# Altium PCB PCB2.PcbDoc (part 3 of 3)
Units mil, origin at the board's own origin, x right, y up, seen from the top; angles counter-clockwise.
Board outline 7000 x 3315 mil, 4 copper layers (Top Signal, GND, PWR, Bottom Signal), stack 23.756 mil thick; 198 components, 124 nets, 690 pads, 273 vias.
Unrouted connection lines stored in the file: 2.
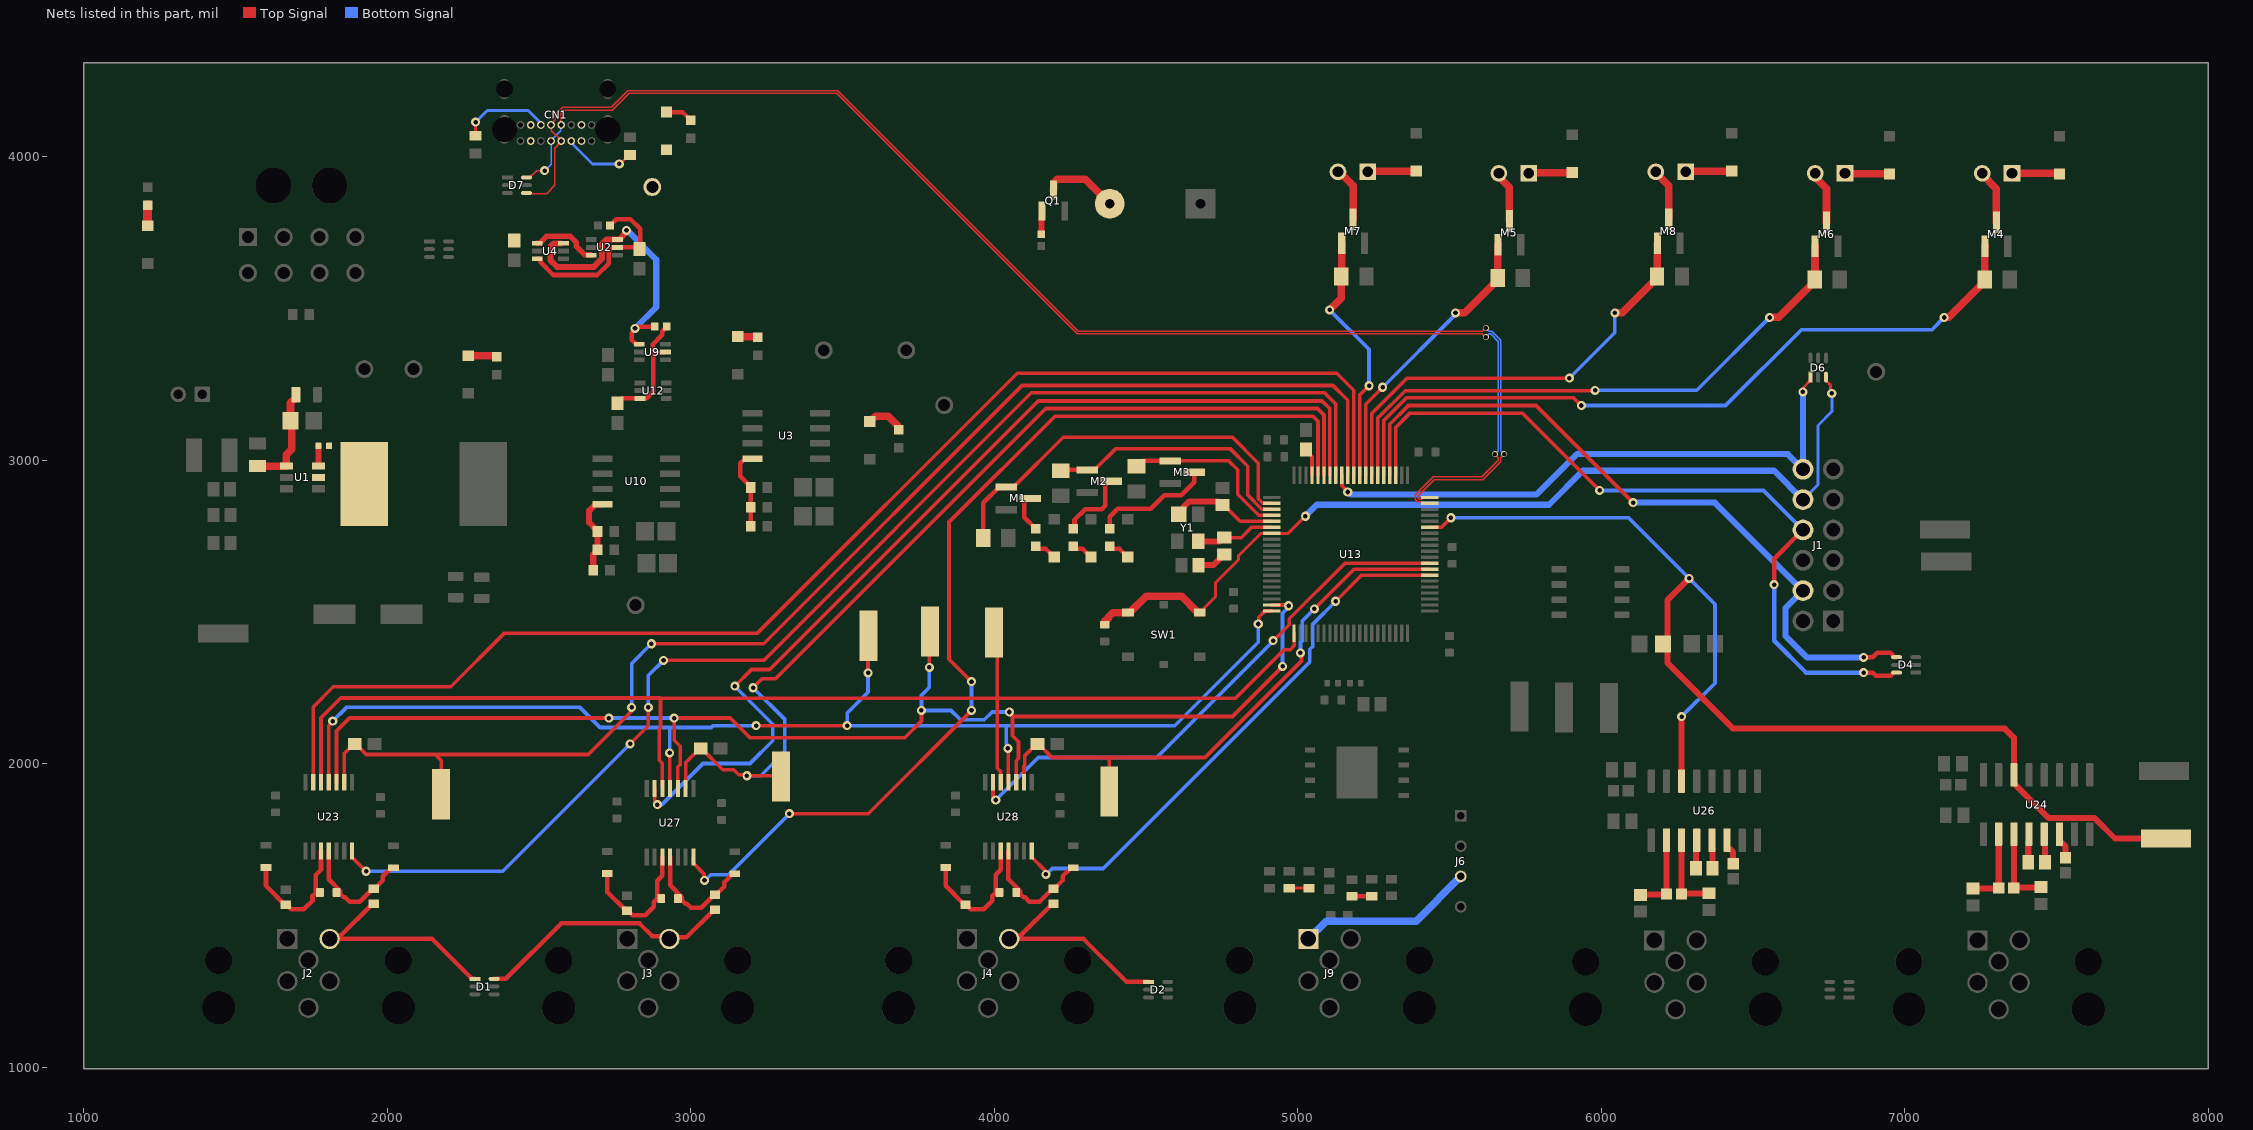
[diagram p5: the nets of this part, all layers, seen from the top]

## Via types
v1: diameter 30, hole 15, Top Signal to Bottom Signal, 174 vias
v2: diameter 50, hole 28, Top Signal to Bottom Signal, 63 vias
v3: diameter 40, hole 20, Top Signal to Bottom Signal, 22 vias
v4: diameter 20, hole 15, Top Signal to Bottom Signal, 5 vias
v5: diameter 50, hole 30, Top Signal to Bottom Signal, 4 vias
v6: diameter 200, hole 125, Top Signal to Bottom Signal, 4 vias
v7: diameter 50, hole 25, Top Signal to Bottom Signal, 1 vias

## Nets (pads, with @x,y where several pads share a name; then routed paths per layer and width w, separated by ;. In a path a pad name is that pad's centre, name@x,y a point inside that pad or via, vN(x,y) a via of type N, cw(c..) or ccw(c..) an arc to the next point about the centre after c; other vN are vias at no path point) (continued)
LC_I2C_SDA: R17.2 SDA.1 U13.55 U24.14 U26.14 | length 3989
  Top Signal w12: U13.55@5435.5,2778.58 5436,2779.08 5474.08,2779.08 v1(5505,2810)
  Top Signal w20: U26.14@6265,1942.44 v1(6265,2155) ; v1(6290,2610) 6218,2538 6218,2408.61 R17.2@6203.39,2394 6218,2379.39 6218,2332 6435,2115 7330,2115 7360,2085 U24.14@7360,1962.44 7360,1935.47 7475.13,1820.34 7625.88,1820.34 7693.22,1753 SDA.1@7861,1753
  Bottom Signal w12: v1(5505,2810) 6090,2810 v1(6290,2610) 6375,2525 6375,2265 v1(6265,2155)
MCU_Debug_LED1: M1.1 R14.1 U13.2 | length 1315.1
  Top Signal w12: M1.1@4039.63,2911.4 4063.25,2911.4 4226.85,3075 4785,3075 4870,2990 4870,2872.87 4885.04,2857.82 4914,2857.82 U13.2@4914.5,2857.32
  Top Signal w15: R14.1@3963.66,2743 3963.66,2859.06 4016.01,2911.4 M1.1@4039.63,2911.4
MCU_Debug_LED2: M2.1 R15.1 U13.3 | length 864.2
  Top Signal w12: M2.1@4307,2967.8 4330.62,2967.8 4400.82,3038 4777,3038 4835,2980 4835,2885 4881.86,2838.14 4914,2838.14 U13.3@4914.5,2837.64
  Top Signal w15: R15.1@4219,2965.34 4221.46,2967.8 M2.1@4307,2967.8
MCU_Debug_LED3: M3.1 R20.1 U13.4 | length 574.2
  Top Signal w12: M3.1@4580.63,2997.4 4772.6,2997.4 4802.08,2967.92 4802.08,2912.59 4802.08,2887.92 4871.55,2818.45 4914,2818.45 U13.4@4914.5,2817.95
  Top Signal w15: R20.1@4469,2979.34 4474.91,2979.34 4492.97,2997.4 M3.1@4580.63,2997.4
MCU_Ext_LED_Ind1: M4.1 R23.1 U13.65 | length 2487.9
  Top Signal w12: U13.65@5283.27,2950.5 5283.27,3130.9 5357.37,3205 5910,3205 v1(5935,3180)
  Top Signal w25: v1(7130,3470) 7130.96,3470.96 7145.72,3470.96 7263.86,3589.09 R23.1@7263.86,3595 7264.53,3595.67 7264.53,3704.33 M4.1@7265.2,3705
  Bottom Signal w12: v1(5935,3180) 6410,3180 6660,3430 7090,3430 v1(7130,3470)
MCU_Ext_LED_Ind2: M6.1 R25.1 U13.66 | length 1932.1
  Top Signal w12: U13.66@5263.58,2950.5 5263.58,3138.58 5354,3229 5979,3229 v1(5980,3230) ; v1(6555,3470) v1@6555,3470.39
  Top Signal w25: v1(6555,3470) 6555.96,3470.96 6585.72,3470.96 6703.86,3589.09 R25.1@6703.86,3595 ; R25.1@6703.64,3595.22 R25.1@6703.86,3595 ; M6.1@6705.2,3705 6704.53,3704.33 6704.53,3595.67 R25.1@6703.86,3595
  Bottom Signal w12: v1(5980,3230) 6315,3230 v1(6555,3470)
MCU_Ext_LED_Ind3: M8.1 R27.1 U13.67 | length 1482.3
  Top Signal w12: U13.67@5243.9,2950.5 5243.9,3153.9 5360,3270 v1(5895,3270)
  Top Signal w25: v1(6045,3485) 6069.76,3485 6183.86,3599.09 R27.1@6183.86,3605 6184.53,3605.67 6184.53,3714.33 M8.1@6185.2,3715
  Bottom Signal w12: v1(5895,3270) 6045,3420 v1(6045,3485)
MCU_Ext_LED_Ind4: M5.1 R24.1 U13.68 | length 957.8
  Top Signal w12: U13.68@5224.21,2950.5 5224.21,3184.21 v1(5280,3240)
  Top Signal w25: v1(5520,3485) 5520.96,3485.96 5550.72,3485.96 5658.86,3594.09 R24.1@5658.86,3600 ; R24.1@5658.64,3600.22 R24.1@5658.86,3600 ; M5.1@5660.2,3710 5659.53,3709.33 5659.53,3600.67 R24.1@5658.86,3600
  Bottom Signal w12: v1(5280,3240) 5518.47,3478.47 5518.47,3483.47 v1(5520,3485)
MCU_Ext_LED_Ind5: M7.1 R26.1 U13.69 | length 855.9
  Top Signal w12: v1@5103.47,3502.32 5103.47,3496.53 v1(5105,3495) ; U13.69@5204.53,2950.5 5204.53,3214.53 v1(5235,3245)
  Top Signal w25: v1(5105,3495) 5143.86,3533.86 R26.1@5143.86,3605 ; R26.1@5143.64,3605.22 R26.1@5143.86,3605 ; M7.1@5145.2,3715 5144.53,3714.33 5144.53,3605.67 R26.1@5143.86,3605
  Bottom Signal w12: v1(5105,3495) 5235,3365 v1(5235,3245)
NetC1_1: C1.1 L1.1 U1.5
NetC1_2: C1.2 U1.6 | length 67.2
  Top Signal w20: C1.2@1772.28,3047 cw(c1772.28,3045.98) 1773.3,3045.98 U1.6@1773.3,2980.4
NetC7_1: C7.1 R1.1 R3.1 U1.1 | length 348.4
  Top Signal w25: R3.1@1572,2980.6 1572,2980.4 U1.1@1667,2980.4 1667,3017.82 1685.5,3036.32 1685.5,3125.11 R1.1@1680.61,3130 1680.61,3188.26 1695.26,3202.91 1696.11,3202.91 1698.57,3205.37 C7.1@1698.57,3216
NetC13_2: C13.2 R5.1 R6.2 U3.4 | length 260.9
  Top Signal w15: C13.2@3197.44,2790 R6.2@3197.44,2845 R5.1@3197.44,2910 3197.44,2911.97 3163,2946.41 3163,2989.5 3175.5,3002 3200.75,3002 U3.4@3203.75,3005
NetC16_2: C16.2 R10.1 R11.2 U10.4 | length 266.3
  Top Signal w20: C16.2@2678.44,2637 2678.44,2689.03 2692.44,2703.03 R11.2@2692.44,2705 R10.1@2692.44,2765 2686.69,2770.75 2686.69,2772.72 2665,2794.41 2665,2833.5 2686,2854.5 2708.25,2854.5 U10.4@2708.75,2855
NetC27_2: C27.2 R22.1 | length 105.9
  Top Signal w20: C27.2@4671.28,2652.72 C27.2@4672.56,2654 4722.24,2654 4744.38,2676.13 4744.38,2679.76 4754.06,2689.44 R22.1@4758,2689.44 R22.1@4756.72,2688.16
NetC32_2: C32.2 C33.2 R33.1 U23.3 | length 429.6
  Top Signal w15: C32.2@1600,1657.48 1600,1596.81 1662.05,1534.76 R33.1@1665,1534.76 ; R33.1@1667.95,1534.76 1682.72,1520 1725,1520 1753.32,1548.32 1753.32,1563.68 1764.65,1575 1764.65,1633.54 1781.18,1650.07 U23.3@1781.18,1711.81
NetC33_1: C33.1 C34.2 R34.1 U23.4 | length 396.8
  Top Signal w15: U23.4@1806.77,1711.81 1806.77,1618.5 1845.35,1579.92 1845.35,1575 1845.35,1570.08 1856.68,1558.76 1861.6,1558.76 1875.35,1545 1909.25,1545 1952.05,1587.8 R34.1@1955,1587.8 1957.95,1587.8 1985,1614.84 1985,1628.19 2013.5,1656.69 C34.2@2020,1656.69
NetC38_2: C38.2 U24.6 | length 90
  Top Signal w20: U24.6@7510,1767.56 7510,1740.59 7511.81,1738.78 7518.28,1738.78 7530,1727.06 C38.2@7530,1689.61
NetC39_1: C39.1 R36.2 U24.2 | length 264.1
  Top Signal w20: R36.2@7225,1587.56 7226.22,1588.78 7309.17,1588.78 C39.1@7310.39,1590 7310.2,1590.2 7310.2,1767.36 U24.2@7310,1767.56
NetC39_2: C39.2 R35.2 U24.3 | length 269.2
  Top Signal w20: U24.3@7360,1767.56 7359.8,1767.36 7359.8,1590.2 C39.2@7359.61,1590 7360.89,1591.28 7448.72,1591.28 R35.2@7450,1592.56
NetC40_1: C40.1 U24.4 | length 93.6
  Top Signal w20: C40.1@7407.44,1675 7407.44,1738.03 7410,1740.59 U24.4@7410,1767.56
NetC40_2: C40.2 U24.5 | length 93.6
  Top Signal w20: U24.5@7460,1767.56 7460,1740.59 7462.56,1738.03 C40.2@7462.56,1675
NetC44_2: C44.2 U26.6 | length 90
  Top Signal w20: U26.6@6415,1747.56 6415,1720.59 6416.81,1718.78 6423.28,1718.78 6435,1707.06 C44.2@6435,1669.61
NetC45_1: C45.1 R44.2 U26.2 | length 264.1
  Top Signal w20: R44.2@6130,1567.56 6131.22,1568.78 6214.17,1568.78 C45.1@6215.39,1570 6215.2,1570.2 6215.2,1747.36 U26.2@6215,1747.56
NetC45_2: C45.2 R43.2 U26.3 | length 269.2
  Top Signal w20: U26.3@6265,1747.56 6264.8,1747.36 6264.8,1570.2 C45.2@6264.61,1570 6265.89,1571.28 6353.72,1571.28 R43.2@6355,1572.56
NetC46_1: C46.1 U26.4 | length 93.6
  Top Signal w20: C46.1@6312.44,1655 6312.44,1718.03 6315,1720.59 U26.4@6315,1747.56
NetC46_2: C46.2 U26.5 | length 93.6
  Top Signal w20: U26.5@6365,1747.56 6365,1720.59 6367.56,1718.03 C46.2@6367.56,1655
NetC49_2: C49.2 C50.2 R45.1 U27.3 | length 429.6
  Top Signal w15: C49.2@2725,1637.48 2725,1576.81 2787.05,1514.76 R45.1@2790,1514.76 ; R45.1@2792.95,1514.76 2807.72,1500 2850,1500 2878.32,1528.32 2878.32,1543.68 2889.65,1555 2889.65,1613.54 2906.18,1630.07 U27.3@2906.18,1691.81
NetC50_1: C50.1 C51.2 R46.1 U27.4 | length 396.8
  Top Signal w15: U27.4@2931.77,1691.81 2931.77,1598.5 2970.35,1559.92 2970.35,1555 2970.35,1550.08 2981.68,1538.76 2986.6,1538.76 3000.35,1525 3034.25,1525 3077.05,1567.8 R46.1@3080,1567.8 3082.95,1567.8 3110,1594.84 3110,1608.19 3138.5,1636.69 C51.2@3145,1636.69
NetC54_2: C54.2 C55.2 R47.1 U28.3 | length 429.6
  Top Signal w15: C54.2@3840,1657.48 3840,1596.81 3902.05,1534.76 R47.1@3905,1534.76 ; R47.1@3907.95,1534.76 3922.72,1520 3965,1520 3993.32,1548.32 3993.32,1563.68 4004.65,1575 4004.65,1633.54 4021.18,1650.07 U28.3@4021.18,1711.81
NetC55_1: C55.1 C56.2 R48.1 U28.4 | length 396.8
  Top Signal w15: U28.4@4046.77,1711.81 4046.77,1618.5 4085.35,1579.92 4085.35,1575 4085.35,1570.08 4096.68,1558.76 4101.6,1558.76 4115.35,1545 4149.25,1545 4192.05,1587.8 R48.1@4195,1587.8 4197.95,1587.8 4225,1614.84 4225,1628.19 4253.5,1656.69 C56.2@4260,1656.69
NetCN1_A5: CN1.A5 R28.2 | length 240.7
  Top Signal w10: v1(2764,3976) 2766.59,3976 2796.06,4005.47 R28.2@2800,4005.47
  Bottom Signal w10: CN1.A5@2606.2,4051.54 2606.2,4047.32 2611.87,4041.65 2611.87,4040.02 2675.89,3976 v1(2764,3976)
NetCN1_B5: CN1.B5 R29.1 | length 298.8
  Top Signal w10: R29.1@2290,4069.53 2291,4070.53 v1(2291,4114)
  Bottom Signal w10: v1(2291,4114) 2329.36,4152.36 2463.97,4152.36 2500.13,4116.2 2500.13,4114.57 2505.8,4108.9 CN1.B5@2505.8,4104.69
NetDS1_1: DS1.1 U5.2 | length 68.5
  Top Signal w30: U5.2@1210,3772.01 DS1.1@1210,3840.47
NetDS2_1: DS2.1 U6.2 | length 91.4
  Top Signal w15: U6.2@2920,4147.01 2972.52,4147.01 DS2.1@3000,4119.53
NetDS3_1: DS3.1 U7.2 | length 97.8
  Top Signal w25: U7.2@2267.26,3345.26 U7.2@2266,3344 2356.53,3344 cw(c2356.53,3340.53) DS3.1@2360,3340.53
NetDS4_1: DS4.1 U8.2 | length 127.4
  Top Signal w25: U8.2@3590,3127.01 3595.22,3132.22 3596.2,3132.22 3608.98,3145 3650,3145 3681.75,3113.25 3681.75,3102.78 DS4.1@3685,3099.53
NetDS5_1: DS5.1 U11.2 | length 66.4
  Top Signal w25: U11.2@3155,3407.01 3217.52,3407.01 cw(c3217.52,3404.53) DS5.1@3220,3404.53
NetDS6_1: DS6.1 U14.2 | length 75.7
  Top Signal w15: DS6.1@4136,2715.47 4144.25,2707.22 4170.27,2707.22 4196.46,2681.03 U14.2@4197.45,2681.03
NetDS6_2: DS6.2 M1.3 | length 131.6
  Top Signal w15: M1.3@4118.37,2874 4103.31,2874 4099,2869.69 4099,2811.53 DS6.2@4136,2774.53
NetDS7_1: DS7.1 U15.2 | length 73
  Top Signal w15: DS7.1@4260,2715.47 4268.25,2707.22 4291.54,2707.22 4317.74,2681.03 U15.2@4318.72,2681.03
NetDS7_2: DS7.2 M2.3 | length 249.2
  Top Signal w15: DS7.2@4260,2774.53 4264.42,2778.95 4264.42,2803.42 4299.62,2838.62 4353.62,2838.62 4365,2850 4365,2926.09 4369.31,2930.4 M2.3@4385.74,2930.4
NetDS8_1: DS8.1 U16.2 | length 74.3
  Top Signal w15: DS8.1@4380,2715.48 4388.24,2707.23 4412.82,2707.23 4439.02,2681.03 U16.2@4440,2681.03
NetDS8_2: DS8.2 M3.3 | length 397.8
  Top Signal w15: DS8.2@4380,2774.53 4380,2813 4407,2840 4516,2840 4560,2884 4616,2884 4659.37,2927.37 M3.3@4659.37,2960
NetJ6_03: J6.03 J9.1 | length 586.9
  Bottom Signal w25: J9.1@5035.4,1422.08 5094.32,1481 5390,1481 J6.03@5537,1628
NetLS1_N: LS1.N Q1.3 | length 246.1
  Top Signal w25: Q1.3@4195,3890 4196,3891 4196,3913.28 4207.72,3925 4300.39,3925 LS1.N@4380.39,3845
NetM4_3: M4.3 P1.2 | length 180.6
  Top Signal w25: P1.2@7255.79,3945 7255.79,3941.42 7302.6,3894.61 M4.3@7302.6,3783.74
NetM5_3: M5.3 P2.2 | length 180.6
  Top Signal w25: P2.2@5650.79,3950 5650.79,3946.42 5697.6,3899.61 M5.3@5697.6,3788.74
NetM6_3: M6.3 P3.2 | length 180.6
  Top Signal w25: P3.2@6695.79,3945 6695.79,3941.42 6742.6,3894.61 M6.3@6742.6,3783.74
NetM7_3: M7.3 P4.2 | length 180.6
  Top Signal w25: P4.2@5135.79,3955 5135.79,3951.42 5182.6,3904.61 M7.3@5182.6,3793.74
NetM8_3: M8.3 P5.2 | length 180.6
  Top Signal w25: P5.2@6175.79,3955 6175.79,3951.42 6222.6,3904.61 M8.3@6222.6,3793.74
NetP1_1: P1.1 U17.2 | length 157.1
  Top Signal w25: P1.1@7354.21,3945 7508.19,3945 cw(c7508.19,3942.99) U17.2@7510.2,3942.99
NetP2_1: P2.1 U18.2 | length 144.9
  Top Signal w25: P2.1@5761.52,3945 5763.01,3946.5 5903.7,3946.5 U18.2@5905.2,3947.99
NetP3_1: P3.1 U19.2 | length 147.2
  Top Signal w25: P3.1@6803.82,3945 6804.82,3944 6949.19,3944 U19.2@6950.2,3942.99
NetP4_1: P4.1 U20.2 | length 160.3
  Top Signal w25: P4.1@5231.12,3950 5232.62,3951.5 5388.7,3951.5 U20.2@5390.2,3952.99
NetP5_1: P5.1 U21.2 | length 153
  Top Signal w25: P5.1@6278.43,3950 6279.92,3951.5 6428.7,3951.5 U21.2@6430.2,3952.99
NetQ1_1: Q1.1 R13.2 | length 77.2
  Top Signal w20: R13.2@4155,3744.69 4155,3798.25 4157.25,3800.5 Q1.1@4157.25,3821
NetR2_1: R2.1 R7.1 U2.5 U4.3 | length 617.1
  Top Signal w15: U4.3@2494.07,3663.04 2503.91,3663.04 2503.91,3653.19 2547.1,3610 2692,3610 2729.09,3647.09 2729.09,3688.05 2741.67,3700.63 2757.93,3700.63 U2.5@2758.31,3701 2825.56,3701 R7.1@2831,3695.56 2833,3697.56 2833,3701 2833,3762 2801,3794 2754.68,3794 R2.1@2733.68,3773
NetR8_1: R8.1 R12.1 U9.5 U12.3 | length 409
  Top Signal w15: R12.1@2759,3187.56 2759,3190.43 2771.98,3203.41 U12.3@2832.69,3203.41 2833.07,3203.78 2854.78,3203.78 2876,3225 2876,3346.99 2885.01,3356 U9.5@2916.31,3356 ; 2887,3356 2883,3360 2882.86,3360 2874.08,3368.79 2874.08,3381.21 2905.61,3412.75 2905.61,3424.93 R8.1@2920.68,3440
NetR37_1: R37.1 R38.2 | length 65.2
  Top Signal w15: R37.1@5179.1,1562.58 5179.51,1563 5243.49,1563 R38.2@5243.9,1563.42
NetR40_1: R40.1 R41.2 | length 65.3
  Top Signal w10: R41.2@4971.9,1589.42 4971.99,1589.5 5037.01,1589.5 R40.1@5037.1,1589.58
NetR49_1: R49.1 U13.77 | length 87.2
  Top Signal w12: R49.1@5032,3031.44 5032,3026.57 5047.05,3011.52 U13.77@5047.05,2950.5
NRST: C26.2 D6.3 J1.10 SW1.1 SW1.2 U13.7 | length 3081.8
  Top Signal w10: SW1.1@4436.72,2502 SW1.1@4440.89,2497.83 ; SW1.2@4677.11,2497.83 4683.02,2497.83 4691.8,2506.61 4691.8,2512.52 4729.28,2550 4729.28,2596.28 4805,2672 4805,2685 4878.4,2758.4 4914,2758.4 U13.7@4914.5,2758.9 4968.54,2758.9 5024.64,2815 v1(5025,2815) ; D6.3@6740.59,3273.47 6740.59,3262.09 6756.17,3246.5 6756.17,3223.83 v1(6760,3220)
  Top Signal w25: C26.2@4364,2470.35 4368.92,2470.35 4375.24,2476.68 4375.24,2481.6 4390.2,2496.55 4439.61,2496.55 SW1.1@4440.89,2497.83 ; SW1.1@4446.8,2497.83 4500.7,2551.74 4617.3,2551.74 4671.2,2497.83 SW1.2@4677.11,2497.83
  Bottom Signal w10: J1.10@6665,2870 6714.25,2919.25 6714.25,3114.25 6760,3160 v1(6760,3220)
  Bottom Signal w20: v1(5025,2815) 5063,2853 5828,2853 5940,2965 6570,2965 J1.10@6665,2870
PH0_OSC_IN: C25.2 U13.5 Y1.1 | length 355.5
  Top Signal w12: C25.2@4752,2852.44 4755.94,2852.44 4810.11,2798.27 U13.5@4914.5,2798.27
  Top Signal w20: Y1.1@4607.5,2822 4623,2837.5 4623,2844.19 4642.81,2864 4736.5,2864 4748.06,2852.44 C25.2@4752,2852.44
PH0_OSC_OUT: R22.2 U13.6 Y1.3 | length 266.2
  Top Signal w12: R22.2@4754.06,2744.56 R22.2@4761.94,2744.56 ; R22.2@4758,2744.56 4813.56,2744.56 4847.58,2778.58 U13.6@4914.5,2778.58
  Top Signal w20: Y1.3@4671.5,2732 4741.5,2732 R22.2@4754.06,2744.56
PrgmVsUSB: R8.2 U2.6 U4.6 U9.1 | length 959.3
  Top Signal w15: U9.1@2829.69,3381.59 2819.85,3381.59 2806,3395.44 2806,3419.94 2816,3429.94 v1(2816,3434) 2820.06,3434 2826.06,3440 R8.2@2881.31,3440
  Top Signal w20: U4.6@2572.59,3714.22 2548.72,3714.22 2537,3702.5 2537,3659 2559,3637 2680,3637 2707,3664 2707,3712 2721.59,3726.59 U2.6@2758.31,3726.59 2763.9,3726.59 2786.09,3748.78 2786.09,3755.09 v1(2788,3757)
  Bottom Signal w20: v1(2788,3757) 2790,3757 2886,3661 2886,3504 v1(2816,3434)
Prog_SWCLK: D4.4 J1.4 U13.64 | length 2390.3
  Top Signal w12: U13.64@5302.95,2950.5 5302.95,3117.95 5365,3180 5785,3180 v1(6105,2860)
  Top Signal w15: v1(6865,2350) 6895,2350 6910,2365 6953.3,2365 6963.05,2355.25 6963.05,2351.55 6964.01,2350.59 D4.4@6973.47,2350.59
  Bottom Signal w20: v1(6105,2860) 6375,2860 J1.4@6665,2570 6608,2513 6608,2420 6678,2350 v1(6865,2350)
Prog_SWDIO: D4.6 J1.8 U13.63 | length 2527.1
  Top Signal w12: U13.63@5322.64,2950.5 5322.64,3107.64 5370,3155 5740,3155 v1(5995,2900)
  Top Signal w15: v1(6570,2590) 6570,2675 J1.8@6665,2770 ; v1(6865,2300) 6865.3,2299.7 6895.3,2299.7 6905,2290 6954.6,2290 D4.6@6963.05,2298.45
  Bottom Signal w12: v1(5995,2900) 6535,2900 J1.8@6665,2770
  Bottom Signal w15: v1(6570,2590) 6570,2405 6675,2300 v1(6865,2300)
Prog_SWO: D6.1 J1.12 U13.72 | length 1956.3
  Top Signal w10: v1(6665,3225) 6666.91,3226.91 6666.91,3239.59 6689.41,3262.09 D6.1@6689.41,3273.47
  Top Signal w12: U13.72@5145.47,2950.5 5145.97,2950 5145.97,2915.57 5165,2896.54 v1(5165,2895)
  Bottom Signal w20: v1(5165,2895) 5167.71,2895 5175.71,2887 5787,2887 5920,3020 6615,3020 J1.12@6665,2970 v1(6665,3225)
TC1_Con_AN+: D1.1 J2.2 R34.2 | length 727
  Top Signal w15: R34.2@1955,1538.58 1952.05,1538.58 1845.48,1432.01 1819.53,1432.01 J2.2@1809.6,1422.08 2147.52,1422.08 2279.01,1290.59 D1.1@2288.47,1290.59
TC1_nDRDY: U13.73 U23.7 | length 4281.3
  Top Signal w12: U23.7@1883.54,1711.81 1883.54,1691.14 1929.69,1645 v1(1930,1645) ; v1(2800,2065) 2860,2125 v1(2860,2185) ; v1(2910,2340) 3240,2340 4122,3222 5088,3222 5125.79,3184.21 U13.73@5125.79,2950.5
  Bottom Signal w12: v1(1930,1645) 2380,1645 v1(2800,2065) ; v1(2860,2185) 2860,2290 v1(2910,2340)
TC1_nFault: U13.70 U23.13 | length 4436
  Top Signal w12: U23.13@1755.59,1938.19 1755.59,2186.59 1822,2253 2209,2253 2386,2430 3220,2430 4076,3286 5129,3286 5185,3230 5185,2950.66 U13.70@5184.84,2950.5
TC1_SPI_CS: CS1.1 R21.1 U13.71 U23.9 | length 4431.1
  Top Signal w12: U23.9@1857.95,1938.19 1857.95,2033.39 1889.57,2065 1895.32,2065 1930.32,2030 2158,2030 ; CS1.1@2177,1899 2177,2011 2158,2030 ; v1(2805,2185) 2803.47,2183.47 2803.47,2171.7 2661.77,2030 2158,2030 ; v1(2870,2395) 3240,2395 4091,3246 5116,3246 5165.16,3196.84 U13.71@5165.16,2950.5
  Bottom Signal w12: v1(2805,2185) 2805,2330 v1(2870,2395)
TC2_Con_AN+: D1.6 J3.2 R46.2 | length 865.1
  Top Signal w15: D1.6@2351.53,1290.59 2390.59,1290.59 2573.04,1473.04 2830.98,1473.04 2873.5,1430.52 2921.01,1430.52 J3.2@2929.46,1422.08 2934.34,1426.96 2985.43,1426.96 3077.05,1518.58 R46.2@3080,1518.58
TC2_nDRDY: U13.76 U27.7 | length 3400.5
  Top Signal w12: U27.7@3008.54,1691.81 3008.54,1671.14 3043.47,1636.22 3043.47,1616.53 v1(3045,1615) ; v1(3325,1835) 3585,1835 v1(3925,2175) ; v1(3925,2270) 3851,2344 3851,2796 4200,3145 5050,3145 5066.73,3128.27 U13.76@5066.73,2950.5
  Bottom Signal w12: v1(3045,1615) 3046.6,1615 3065.6,1634 3124,1634 v1(3325,1835) ; v1(3925,2175) v1(3925,2270)
TC2_nFault: U13.74 U27.13 | length 3335.5
  Top Signal w12: U27.13@2880.59,1918.19 2881.48,1917.3 2881.48,1875.68 2890,1867.16 v1(2890,1865) ; v1(3145,2255) 3200,2310 3260,2310 4145,3195 5080,3195 5106.1,3168.9 U13.74@5106.1,2950.5
  Bottom Signal w12: v1(2890,1865) 2890.3,1865.3 2905.3,1865.3 3040,2000 3195,2000 3270,2075 3270,2130 v1(3145,2255)
TC2_SPI_CS: CS2.1 R18.1 U13.75 U27.9 | length 3338.2
  Top Signal w12: U27.9@2982.95,1918.19 2982.95,2003.39 3029.57,2050 3035.32,2050 3105.32,1980 3141,1980 3157.56,1963.44 3181.56,1963.44 v1(3185,1960) 3294,1960 CS2.1@3297,1957 ; v1(3205,2250) 3235,2280 3280,2280 4170,3170 5065,3170 5086.42,3148.58 U13.75@5086.42,2950.5
  Bottom Signal w12: v1(3185,1960) 3230,1960 3310,2040 3310,2145 v1(3205,2250)
TC3_Con_AN+: D2.1 J4.2 R48.2 | length 711.7
  Top Signal w15: R48.2@4195,1538.58 4192.05,1538.58 4085.48,1432.01 4059.26,1432.01 J4.2@4049.32,1422.08 4294.18,1422.08 4435.67,1280.59 D2.1@4508.47,1280.59
TC3_nDRDY: U13.47 U28.7 | length 1837.4
  Top Signal w12: U28.7@4123.54,1711.81 4123.54,1691.14 4168.47,1646.22 4168.47,1636.53 v1(4170,1635) ; v1(5125,2535) 5211.1,2621.1 U13.47@5435.5,2621.1
  Bottom Signal w12: v1(4170,1635) 4171.6,1635 4190.6,1654 4359,1654 5040,2335 5040,2376.77 5050,2386.77 5050,2460 v1(5125,2535)
TC3_nFault: U13.49 U28.13 | length 1828.2
  Top Signal w12: U28.13@3995.59,1938.19 3995.59,1891.57 4005,1882.16 v1(4005,1880) ; v1(4919,2405) 4920,2405 4972.49,2457.49 4972.49,2477.49 5155.47,2660.47 U13.49@5435.5,2660.47
  Bottom Signal w12: v1(4005,1880) 4145,2020 4535,2020 4919,2404 v1(4919,2405)
TC3_SPI_CS: CS3.1 R16.1 U13.48 U28.9 | length 1907
  Top Signal w12: U28.9@4097.95,1938.19 4097.95,1991.57 4101,1994.61 4101,2026.43 4139.57,2065 R16.1@4142.44,2065 4145.32,2065 4190.32,2020 4380,2020 ; CS3.1@4379,1908 4379,2019 4380,2020 ; v1(5009,2365) 5012.44,2361.56 5012.44,2337.67 4694.77,2020 4380,2020 ; v1(5055,2510) 5185.79,2640.79 U13.48@5435.5,2640.79
  Bottom Signal w12: v1(5009,2365) 5009,2398 5015,2404 5015,2470 v1(5055,2510)
TC_SPI_MISO: MISO.1 U13.20 U23.11 U27.11 U28.11 | length 4270.8
  Top Signal w12: U23.11@1806.77,1938.19 1806.77,2124.61 1820,2137.84 v1(1820,2140) ; v1(2930,2035) 2930.89,2034.11 2930.89,1919.07 U27.11@2931.77,1918.19 ; v1(3215,2125) v1(3515,2125) ; v1(3584,2299) 3584,2419 MISO.1@3586,2421 ; v1(4045,2050) 4045.89,2049.11 4045.89,1939.07 U28.11@4046.77,1938.19 ; v1(4870,2460) 4871.53,2461.53 4871.53,2482.52 4892,2502.99 U13.20@4914.5,2502.99
  Bottom Signal w12: v1(1820,2140) 1865,2185 2635,2185 2701,2119 2930,2119 ; v1(2930,2035) 2930,2119 ; v1(3215,2125) 3073.06,2125 3067.06,2119 2930,2119 ; v1(3584,2299) 3584,2235 3515,2166 v1(3515,2125) 4040,2125 ; v1(4045,2050) 4041.56,2053.44 4041.56,2064.47 4040,2066.03 4040,2125 ; v1(4870,2460) 4870,2400 4595,2125 4040,2125
TC_SPI_MOSI: MOSI.1 U13.21 U23.12 U27.12 U28.12 | length 4384.5
  Top Signal w12: U23.12@1781.18,1938.19 1781.18,2151.18 1846,2216 2899,2216 2900,2215 ; U27.12@2906.18,1918.19 2906.18,2001.34 2895.36,2012.16 2895.36,2111.26 2900,2115.9 2900,2215 ; MOSI.1@3999,2450 4010,2439 4010,2215 ; U28.12@4021.18,1938.19 4020.84,1938.53 4020.84,1973.75 4010,1984.6 4010,2215 ; U13.21@4987.99,2429.5 4987.99,2387.83 4975.16,2375 4955,2375 4795,2215 4010,2215 ; 2900,2215 4010,2215
TC_SPI_SCK: SCK.1 U13.19 U23.10 U27.10 U28.10 | length 4498.3
  Top Signal w12: U23.10@1832.36,1938.19 1832.36,2107.36 1875,2150 v1(2730,2150) ; U27.10@2957.36,1918.19 2957.36,1989.48 2965,1997.11 2965,2057.12 2945,2077.12 v1(2945,2150) 3130,2150 3195,2085 3705,2085 3760,2140 v1(3760,2175) ; v1(3786,2317) 3786,2433 SCK.1@3788,2435 ; v1(4050,2170) 4050,2165.13 4060,2155.13 4060,2155 ; U28.10@4072.36,1938.19 4072.36,2009.48 4080,2017.11 4080,2072.06 4060,2092.06 4060,2155 ; U13.19@4914.5,2522.68 4965.16,2522.68 4967.84,2520 v1(4970,2520) ; v1(4950,2320) 4785,2155 4060,2155
  Bottom Signal w12: v1(2730,2150) v1(2945,2150) ; v1(3786,2317) 3786,2251 3760,2225 v1(3760,2175) 3857.48,2175 3888.48,2144 3967.27,2144 3993.27,2170 v1(4050,2170) ; v1(4950,2320) 4950,2495.13 4970,2515.13 v1(4970,2520)
USB_D_N: CN1.A7 CN1.B7 D7.6 U13.59 | length 4533.1
  Top Signal w4.35: D7.6@2458.53,3931.59 2469.91,3931.59 2492.32,3954 v1(2518,3954) v1@2518.96,3954 ; CN1.B7@2572.73,4104.69 2571,4106.42 2571,4142 2582,4153 2741.22,4153 2796.61,4208.39 3480.39,4208.39 4273.13,3415.65 5608.32,3415.65 5618.64,3405.33 v4(5620,3405.33) ; U13.59@5435.5,2857.32 5412,2857.32 5406.83,2862.49 5396.11,2862.49 5388.09,2870.51 5388.09,2886.53 5446.47,2944.92 5606.28,2944.92 5660.33,2998.97 5660.33,3008.32 5650,3018.64 v4(5650,3020)
  Bottom Signal w4.35: v1(2518,3954) 2539.27,3975.27 CN1.A7@2539.27,4051.54 2539.27,4053.38 2571.25,4085.37 2571.25,4103.21 CN1.B7@2572.73,4104.69 ; v4(5620,3405.33) 5621.36,3405.33 5631.68,3415.65 5635.29,3415.65 5660.33,3390.61 5660.33,3031.68 5650,3021.36 v4(5650,3020)
USB_D_P: CN1.A6 CN1.B6 D7.4 U13.60 | length 4641.1
  Top Signal w4.35: D7.4@2458.53,3880.41 ccw(c2460.44,3880.41) 2460.44,3878.5 2525.5,3878.5 2552,3905 2552,4028.44 2557.71,4034.71 ccw(c2539.27,4051.54) 2558.07,4035.11 ; 2558.08,4035.12 2570.19,4048.99 CN1.A6@2572.73,4051.54 2572.73,4053.38 2540.75,4085.37 2540.75,4103.21 CN1.B6@2539.27,4104.69 2539.27,4106.53 2553.86,4121.13 2553.86,4138.08 2578.13,4162.35 2737.35,4162.35 2792.74,4217.74 3484.26,4217.74 4277,3425 5608.32,3425 5618.64,3435.33 v4(5620,3435.33) ; U13.60@5435.5,2877.01 5412,2877.01 5406.83,2871.84 5399.98,2871.84 5397.43,2874.39 5397.43,2882.66 5450.35,2935.57 5610.15,2935.57 5669.67,2995.1 5669.67,3008.32 5680,3018.64 v4(5680,3020)
  Bottom Signal w4.35: v4(5620,3435.33) 5621.36,3435.33 5631.68,3425 5639.16,3425 5669.67,3394.48 5669.67,3031.68 5680,3021.36 v4(5680,3020)
VBUS_USB: CN1.A4 CN1.A9 CN1.B4 CN1.B9 R4.1 U2.3 U4.1 U6.1 VBUS.1 | length 220.6
  Top Signal w18: U4.1@2493.69,3714.59 2501.28,3714.59 2523.91,3737.22 2603.27,3737.22 2621.98,3718.51 2621.98,3705.46 2650.9,3676.54 2670.57,3676.54 U2.3@2671.69,3675.41
pads on no net: CN1.A8 CN1.B8 D5.4 D5.6 D6.4 D6.6 D7.1 D7.3 J1.2 J1.9 J1.11 J2.0 J2.1 J2.4 J3.0 J3.1 J3.4 J4.0 J4.1 J4.4 J5.0 J6.01 J7.0 J7.2 J8.0 J8.2 J9.0 J9.4 SW1.G1 U2.4 U4.4 U4.5 U9.4 U12.4 U12.5 U13.9 U13.10 U13.11 U13.18 U13.22 U13.23 U13.26 U13.30 U13.31 U13.32 U13.35 U13.36 U13.46 U13.52 U13.53 U13.56 U13.57 U13.58 U13.78 U23.6 U24.10 U24.11 U26.10 U26.11 U27.6 U28.6
copper on no net:
  other v6: 1145,1140 7855,1140 1145,4165 7855,4165

## Polygon pours and split planes (outlines as drawn)
GND on Top Signal "GND_L01_P036" (solid, pour order 36): 1119,2164 ccw(c1119,2064) 1019,2064 1019,1455 ccw(c1119,1455) 1119,1355 1228,1355 cw(c1228,1255) 1328,1255 1328,1115 ccw(c1428,1115) 1428,1015 7695,1015 ccw(c7695,1025) 7705,1025 7705,1197 cw(c7805,1197) 7805,1297 7886,1297 ccw(c7886,1392) 7981,1392 7981,2064 ccw(c7881,2064) 7881,2164 1381,2164
+48V on Top Signal "+48V_L01_P035" (solid, pour order 35): 1081,3904 cw(c1181,3904) 1181,4004 1619,4004 cw(c1619,3904) 1719,3904 1719,2719 cw(c1619,2719) 1619,2619 1181,2619 cw(c1181,2719) 1081,2719 1081,3789
VBUS_USB on Top Signal "VBUS_USB_L01_P033" (solid, remove dead copper, pour order 33): 2225,4200 cw(c2325,4200) 2325,4300 2996,4300 cw(c2996,4200) 3096,4200 3096,3800 cw(c2996,3800) 2996,3700 2325,3700 cw(c2325,3800) 2225,3800 2225,4140
+10V on Top Signal "+10V_L01_P030" (solid, pour order 30): 2589,3109 2589,3043 ccw(c2607,3043) 2607,3025 2724,3025 cw(c2724,2990) 2759,2990 2759,2959 cw(c2736,2959) 2736,2936 2626,2936 ccw(c2626,2899) 2589,2899 cw(c2575,2899) 2575,2885 2555,2885 cw(c2555,2896) 2544,2896 2544,3023 cw(c2574,3023) 2574,3053 2590,3053
+10V on Top Signal "+10V_L01_P028" (solid, pour order 28): 2066,2447 2489,2447 ccw(c2489,2547) 2589,2547 2589,3162 ccw(c2489,3162) 2489,3262 2204,3262 cw(c2204,3296) 2170,3296 ccw(c2105,3296) 2105,3361 1816,3361 ccw(c1816,3261) 1716,3261 1716,3129 ccw(c1758,3129) 1758,3087 2086,3087 cw(c2086,2987) 2186,2987 2186,2753 cw(c2124,2753) 2124,2691 2010,2691 ccw(c2010,2623) 1942,2623 1942,2515 ccw(c2011,2515) 2011,2446
GND on Top Signal "GND_L01_P031" (solid, pour order 31): 3501,3194 cw(c3501,3149) 3546,3149 3546,2923 3448,2923 cw(c3448,2954) 3417,2954 ccw(c3400,2954) 3400,2971 3394,2971 cw(c3394,3007) 3358,3007 3358,3157 cw(c3395,3157) 3395,3194 3483,3194
NetC1_1 on Top Signal "NETC1_1_L01_P026" (solid, pour order 26): 1791,3053 cw(c1811,3053) 1811,3073 1985,3073 cw(c1985,3036) 2022,3036 2022,2792 cw(c2001,2792) 2001,2771 1847,2771 cw(c1847,2790) 1828,2790 1828,2911 ccw(c1812,2911) 1812,2927 1757,2927 cw(c1757,2943) 1741,2943 cw(c1761,2943) 1761,2963 1775,2963 ccw(c1775,2979) 1791,2979 1791,3022
+5V on Top Signal "+5V_L01_P007" (solid, pour order 7): 3205,3305 cw(c3197.69,3252.64) 3250,3245 3250,3100 cw(c3235,3100) 3235,3085 3095,3085 cw(c3095,3145) 3035,3145 3035,3205 cw(c3127.5,3212.5) 3120,3305
+5V_FSB on Top Signal "+5V_FSB_L01_P020" (solid, pour order 20): 2609,2574 2609,2830 cw(c2697,2830) 2697,2918 2784,2925 cw(c2788.07,2826.07) 2887,2830 2887,2522 cw(c2823,2522) 2823,2458 2708,2458 cw(c2708,2558) 2608,2558 2608,2622
+10V on Top Signal "+10V_L01_P010" (solid, pour order 10): 4861.1,4185.28 cw(c4941.1,4185.28) 4941.1,4265.28 7581.1,4265.28 cw(c7581.1,4190.28) 7656.1,4190.28 7656.1,4125.28 cw(c7556.1,4125.28) 7556.1,4025.28 4896.1,4025.28 cw(c4896.1,4060.28) 4861.1,4060.28 4861.1,4125.28
+3V3 on Top Signal "+3V3_L01_P014" (solid, pour order 14): 7440,3085.5 7550,3085.5 7550,2885.5 7545,2880.5 7440,2880.5
GND on Top Signal "GND_L01_P011" (solid, pour order 11): 3075,3015 ccw(c3050,3015) 3050,3040 2930,3040 ccw(c2930,2995) 2885,2995 2885,2855 ccw(c2930,2855) 2930,2810 3030,2810 ccw(c3030,2855) 3075,2855
GND on Bottom Signal "GND_L04_P037" (solid, pour order 37): 1348,2164 1120,2164 ccw(c1120,2064) 1020,2064 1020,1455 ccw(c1120,1455) 1120,1355 1228,1355 cw(c1228,1255) 1328,1255 1328,1116 ccw(c1428,1116) 1428,1016 7605,1016 ccw(c7605,1116) 7705,1116 7705,1197 cw(c7805,1197) 7805,1297 7881,1297 ccw(c7881,1397) 7981,1397 7981,2063 ccw(c7881,2063) 7881,2163 7664,2163
+3V3 on PWR (split plane): 7979.9,1015.1 1020.1,1015.1 1020.1,4289.9 7979.9,4289.9
+5V on PWR (split plane): 7690.22,2059.64 7695.35,2058.62 7700.3,2056.94 7704.99,2054.63 7709.34,2051.72 7713.27,2048.27 7716.72,2044.34 7719.63,2039.99 7721.94,2035.3 7723.62,2030.35 7724.64,2025.22 7724.96,2020.36 7724.91,2020 7724.91,1140 7724.96,1139.64 7724.64,1134.78 7723.62,1129.65 7721.94,1124.7 7719.63,1120.01 7716.72,1115.66 7713.27,1111.73 7709.34,1108.28 7704.99,1105.37 7700.3,1103.06 7695.35,1101.38 7690.22,1100.36 7685.36,1100.04 7685,1100.09 5760,1100.09 5759.64,1100.04 5754.78,1100.36 5749.65,1101.38 5744.7,1103.06 5740.01,1105.37 5735.66,1108.28 5731.73,1111.73 5728.28,1115.66 5725.37,1120.01 5723.06,1124.7 5721.38,1129.65 5720.36,1134.78 5720.04,1139.64 5720.09,1140 5720.09,2020 5720.04,2020.36 5720.36,2025.22 5721.38,2030.35 5723.06,2035.3 5725.37,2039.99 5728.28,2044.34 5731.73,2048.27 5735.66,2051.72 5740.01,2054.63 5744.7,2056.94 5749.65,2058.62 5754.78,2059.64 5759.64,2059.96 5760,2059.91 7685,2059.91 7685.36,2059.96
+5V on PWR (split plane): 4795.22,4244.64 4800.35,4243.62 4805.3,4241.94 4809.99,4239.63 4814.34,4236.72 4818.27,4233.27 4821.72,4229.34 4824.63,4224.99 4826.94,4220.3 4828.62,4215.35 4829.64,4210.22 4829.96,4205.36 4829.91,4205 4829.91,3125 4829.96,3124.64 4829.64,3119.78 4828.62,3114.65 4826.94,3109.7 4824.63,3105.01 4821.72,3100.66 4818.27,3096.73 4814.34,3093.28 4809.99,3090.37 4805.3,3088.06 4800.35,3086.38 4795.22,3085.36 4790.36,3085.04 4790,3085.09 1885,3085.09 1884.64,3085.04 1879.78,3085.36 1874.65,3086.38 1869.7,3088.06 1865.01,3090.37 1860.66,3093.28 1856.73,3096.73 1853.28,3100.66 1850.37,3105.01 1848.06,3109.7 1846.38,3114.65 1845.36,3119.78 1845.04,3124.64 1845.09,3125 1845.09,4205 1845.04,4205.36 1845.36,4210.22 1846.38,4215.35 1848.06,4220.3 1850.37,4224.99 1853.28,4229.34 1856.73,4233.27 1860.66,4236.72 1865.01,4239.63 1869.7,4241.94 1874.65,4243.62 1879.78,4244.64 1884.63,4244.96 1885,4244.91 3275,4244.91 4790,4244.91 4790.36,4244.96
GND on GND (split plane): 7979.9,1015.1 1020.1,1015.1 1020.1,4289.9 7979.9,4289.9

## Other copper
Top Signal:
  pour cut-out: 4857,1683 4871,1669 4871,1552 5296,1539 5363,1620 5238,1745 4881,1745
PWR (plane layer: these items are gaps in the copper):
  lines w20: 5710,1140 ccw(c5760,1140) 5760,1090 5830,1090 7655,1090 7685,1090 ccw(c7685,1140) 7735,1140 7735,2020 ccw(c7685,2020) 7685,2070 5830,2070 5760,2070 ccw(c5760,2020) 5710,2020 ; 5710,1140 5710,2020 ; 5710,1140 5710,2020 ; 1835,3125 ccw(c1885,3125) 1885,3075 3275,3075 4790,3075 ccw(c4790,3125) 4840,3125 4840,4205 ccw(c4790,4205) 4790,4255 3275,4255 1885,4255 ccw(c1885,4205) 1835,4205 1835,3125

## Silkscreen, mask and mechanical layers (free items; w line width, h text height)
Top Overlay:
  drawing of 49 lines, arcs and shapes, not listed
  text "-" at 6023,4254.01 h60
  text "-" at 7105,4254.01 h60
  text "-" at 6551,4252.01 h60
  text "-" at 5507,4250.01 h60
  text "-" at 4981,4246.01 h60
  text "+" at 6401,4246 h60
  text "+" at 6926,4246 h60
  text "+" at 5875,4242 h60
  text "+" at 5348,4241 h60
  text "+" at 7476,4241 h60
  text "JLCJLCJLCJLC" at 1379,4191 h60
  text "10V" at 4893,4056 h50 r90
  text "Launch Rail Board" at 3054,3656 h60
  text "-Vikram Procter-" at 3085,3556 h60
  text "TIM1,CH1,PC0" at 4242,3530.66 h50
  text "FSB" at 1188,3220 h120 r90
  text "SWO" at 6389.97,2950 h45
  text "NC" at 6925,2945 h45
  text "NRST" at 6344.99,2850 h45
  text "NC" at 6925.85,2849 h45
  text "SWDIO" at 6307.5,2750 h45
  text "RX" at 6925.85,2748 h45
  text "GND" at 6394.97,2660 h45
  text "TX" at 6925.85,2647 h45
  text "SWCLK" at 6300,2550 h45
  text "GND" at 6925.85,2546 h45
  text "3V3" at 6389.97,2450 h45
  text "5V" at 6925.85,2445 h45
  text "Building Longer Rockets" at 7824.6,2290.1 h120 r90
  text "Reset" at 4298,2195 h100
  text "TC2" at 2538,1686 h140 r90
  text "TC1" at 1395,1677 h140 r90
  text "TC3" at 3652,1670 h140 r90
  text "LC1" at 5802,1612 h120 r90
  text "LC2" at 6923,1594 h120 r90
  text "Anemometer" at 4713,1497 h70 r90
  text "5V 10V OFF" at 5460,1476 h45 r90
Bottom Overlay:
  drawing of 69 lines, arcs and shapes, not listed
  text "PD0" at 5291.91,4225 h60
  text "PC11" at 6339.21,4225 h60
  text "PC12" at 5822.3,4220 h60
  text "PC10" at 6864.61,4220 h60
  text "PA15" at 7415,4220 h60
  text "Ext5" at 5281.91,4130 h60
  text "Ext3" at 6329.21,4130 h60
  text "Ext4" at 5812.3,4125 h60
  text "Ext2" at 6854.61,4125 h60
  text "Ext1" at 7405,4125 h60
  text "AEGIS" at 3907,3939.5 h300
  text "GND" at 1975,3569 h80 r270
  text "48V" at 1354,3558 h80 r270
  text "ATHENA" at 4050,3549.75 h300
  text "Board Info:" at 7920,3284 h80
  text "RxTxN" at 1619,3253 h60 r270
  text "RxTxP" at 1747,3249 h60 r270
  text "1. 5V priority:" at 7914,3182.99 h60
  text "FSB, USB, PRGM" at 7751,3076.99 h60
  text "2. SWD Programming" at 7916,2966.99 h60
  text "3. Debug LEDs PC13," at 7914,2842.99 h60
  text "PC14, PC15" at 7742,2733.99 h60
  text "4. R32 pulls anemom" at 7914,2617.99 h60
  text "AN- to GND" at 7742,2505 h60
  text "5. \"There's no CAN" at 7917,2381 h60
  text "on this bus\"" at 7743,2279 h60
  text "10V" at 4640,1690 h45
  text "AN+" at 4810,1690 h45
  text "VDD" at 5925,1660 h45
  text "NC" at 6067.51,1660 h45
  text "NC" at 1195,1655 h45
  text "AN+" at 1385,1655 h45
  text "AN-" at 4720,1615 h45
  text "AN-" at 6000,1585 h45
  text "AN-" at 1295,1580 h45
  text "NC" at 4620,1535 h45
  text "GND" at 4810,1535 h45
  text "AN+" at 5925,1505 h45
  text "GND" at 6090,1505 h45
  text "NC" at 1195,1500 h45
  text "GND" at 1385,1500 h45
  text "GND" at 4730,1450 h45
  text "GND" at 6010,1420 h45
  text "GND" at 1305,1415 h45
  text "Anemom" at 5333,1057 h80
  text "TC3" at 4083,1047 h80
  text "TC1" at 1828,1042 h80
  text "TC2" at 2963,1037 h80
  text "LC1" at 7428,1037 h80
  text "LC2" at 6348,1032 h80

## Text inside footprints (layer, text, board x,y; h text height)
C2: Top Overlay "+" at 1503.86,3246.02 h59.06 r180
J2: Top Assembly "PANEL EDGE" at 2143.54,1007.99 h39.37
J3: Top Assembly "PANEL EDGE" at 3263.41,1007.99 h39.37
J4: Top Assembly "PANEL EDGE" at 4383.27,1007.99 h39.37
J5: Top Assembly "MAX" at 2025.35,4277.44 h39.37 r180; Top Assembly "PCB EDGE" at 1382.83,4305 h39.37 r180
J7: Top Assembly "PANEL EDGE" at 7713.27,1002.99 h39.37
J8: Top Assembly "PANEL EDGE" at 6648.54,1002.99 h39.37
J9: Top Assembly "PANEL EDGE" at 5508.54,1007.99 h39.37
U3: Top Overlay "*" at 3181.25,3171 h39.37; Top Assembly "*" at 3239,3125 h39.37
U10: Top Overlay "*" at 2686.25,3021 h39.37; Top Assembly "*" at 2744,2975 h39.37
U13: Top Overlay "*" at 4848,2876.85 h39.37; Top Assembly "*" at 4941.5,2861.85 h39.37